# Altium PCB Nixie_Driver.PcbDoc
Units mil, origin at the board's own origin, x right, y up, seen from the top; angles counter-clockwise.
Board outline 4015.75 x 1968.5 mil, 2 copper layers (Top Layer, Bottom Layer); 62 components, 71 nets, 274 pads, 47 vias.
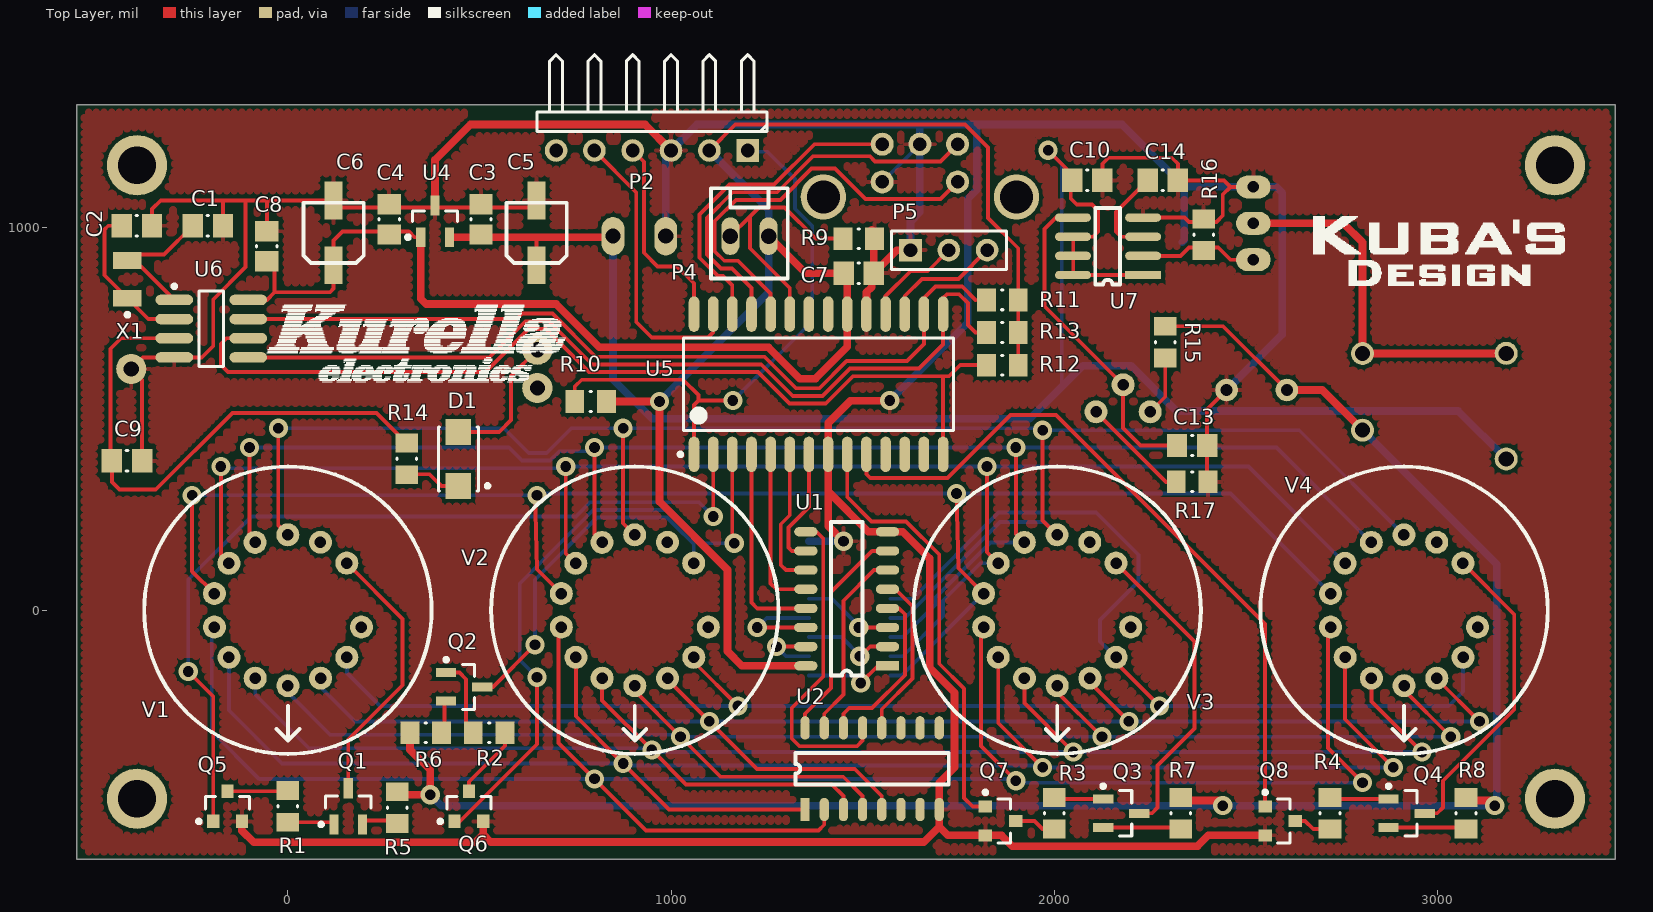
[diagram p0: Top Layer view]
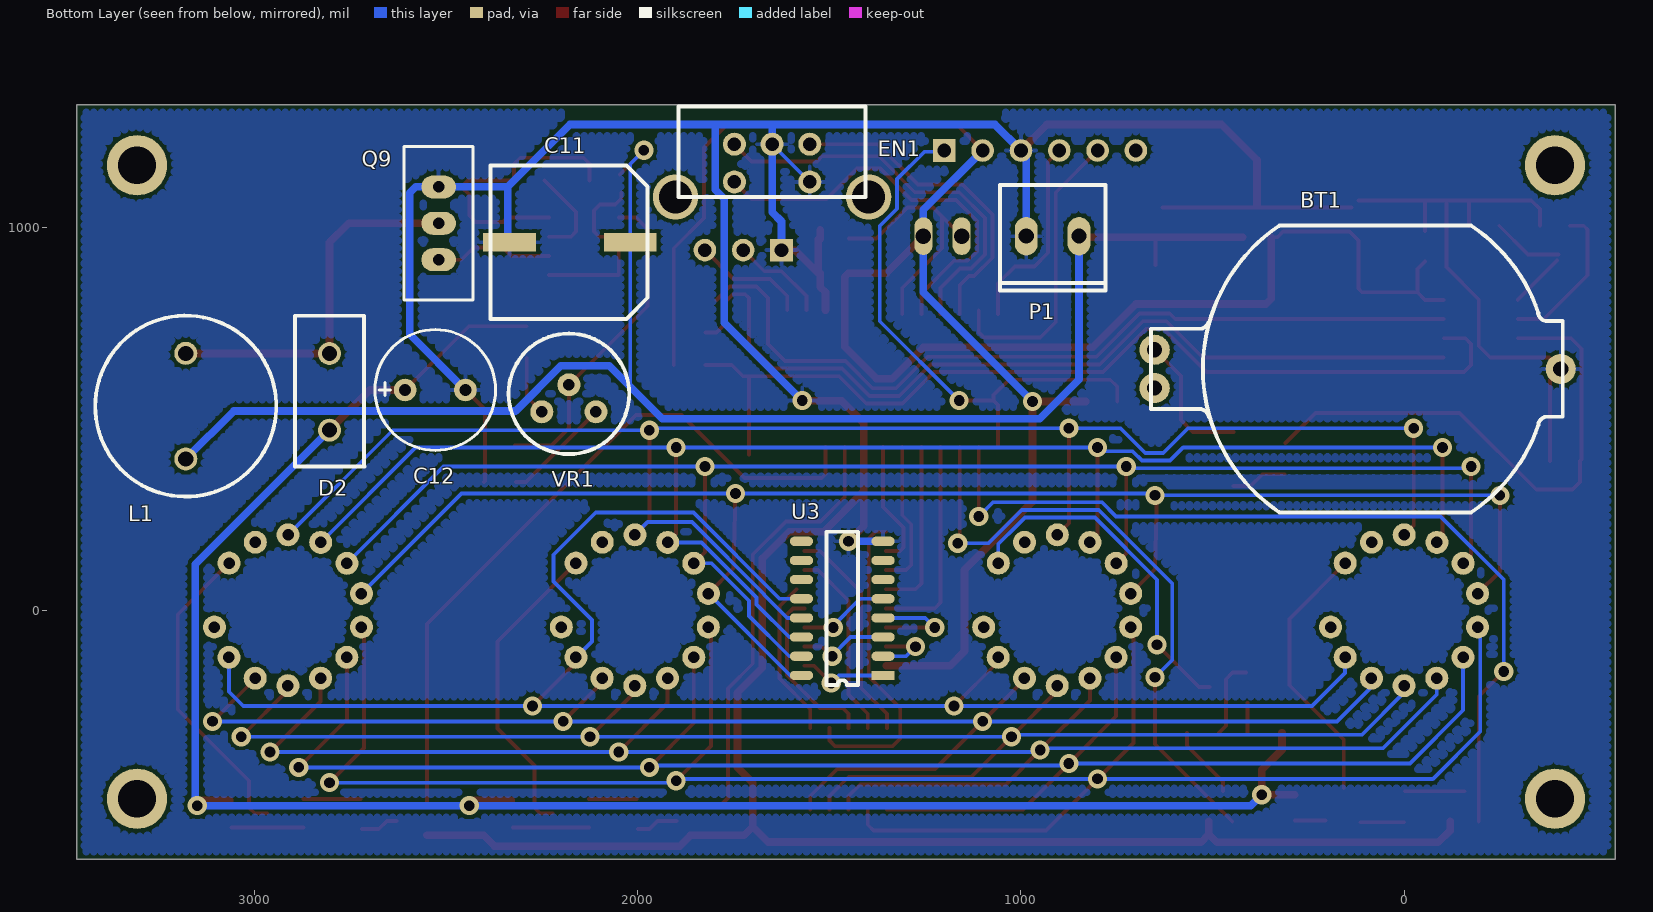
[diagram p1: Bottom Layer view, seen from below]

## Layer stack, top to bottom
Top Layer: signal copper 1.4
Dielectric: dielectric 12.6, FR-4, Dk 4.8
Bottom Layer: signal copper 1.4

## Board outline
-551.18,-649.61 -551.18,1318.9 3464.57,1318.9 3464.57,-649.61

## Design rules (kind name [scope] priority, off if disabled: settings)
Clearance [All] p1: gap=10
PolygonConnect [All] p1: connectstyle=Relief reliefconductorwidth=10 reliefentries=4 polygonreliefangle="90 Angle" airgapwidth=10
RoomDefinition Nixie_Embedded_Supply [InComponentClass('Nixie_Embedded_Supply')] p1: confinementstyle=ConfineIn formatcopy=TRUE lockcomponents=FALSE outline 1765,195 3565,195 3565,1355 1765,1355
RoomDefinition Nixie_Embedded_Controller [InComponentClass('Nixie_Embedded_Controller')] p2: confinementstyle=ConfineIn formatcopy=TRUE lockcomponents=FALSE outline -610,80 1965,80 1965,1885.83 -610,1885.83
RoomDefinition Nixie_Driver [InComponentClass('Nixie_Driver')] p3: confinementstyle=ConfineIn formatcopy=TRUE lockcomponents=FALSE outline -645,-730 3545,-730 3545,475 -645,475
RoutingVias [All] p1: holewidth=28 width=50 viastyle="Through Hole" minholewidth=28 minwidth=50 maxholewidth=28 maxwidth=50
SolderMaskExpansion [All] p1: expansion=4
Width [All] p1: maxlimit=20 minlimit=10 preferedwidth=10
28 further rules are at their usual default settings.

## Classes and differential pairs
component class Nixie_Embedded_Supply: C10 C11 C12 C13 C14 D2 L1 LED1 P6 Q9 R15 R16 R17 U7 VR1
component class Nixie_Driver: Q1 Q2 Q3 Q4 Q5 Q6 Q7 Q8 R1 R2 R3 R4 R5 R6 R7 R8 U1 U2 U3 U? V1 V2 V3 V4
component class Nixie_Embedded_Controller: BT1 C1 C2 C3 C4 C5 C6 C7 C8 C9 D1 EN1 P1 P2 P4 P5 R9 R10 R11 R12 R13 R14 U4 U5 U6 X1

## Components (designator, comment, footprint, x,y, rotation, side; value= is the part's Value field where it differs from the comment)
BT1 "TE 120591-1" TE-120591-1 75,629.92 r180 bottom locked
C1 "CAP 18pF 16V 0805(2012)" CAPC0805(2012)100_M -208.94,1003.74 r180 top
C2 "CAP 18pF 16V 0805(2012)" CAPC0805(2012)100_M -393.94,1003.74 r180 top
C3 "CAP 100nF 16V 0805(2012)" CAPC0805(2012)100_M 504.13,1020.12 r270 top
C4 "CAP 100nF 16V 0805(2012)" CAPC0805(2012)100_M 264.13,1020.12 r270 top
C5 "Polarized capacitor" "RADIAL CAP 4MM" 649.13,985.12 r270 top
C6 "Polarized capacitor" "RADIAL CAP 4MM" 119.13,985.12 r270 top
C7 "CAP 100nF 10V 0805(2012)" CAPC0805(2012)100_M 1490,880 r180 top
C8 "CAP 100nF 10V 0805(2012)" CAPC0805(2012)100_M -55,950 r270 top
C9 "CAP 100pF 10V 0805(2012)" CAPC0805(2012)100_M -420,390 r180 top
C10 "CAP 100nF 16V 0805(2012)" CAPC0805(2012)100_M 2086.61,1122.05 r180 top
C11 "CAP_rad16x10" CAPsmd_rad10 2334.65,960.63 r180 bottom
C12 "CAP_HV" CAP_HV 2450,575 r0 bottom
C13 "CAP 100nF 16V 0805(2012)" CAPC0805(2012)100_M 2360,430 r180 top
C14 "CAP 1nF 25V 0805(2012)" CAPC0805(2012)100_M 2283.46,1122.05 r180 top
D1 "SS14-E3/5AT" VISH-DO-214AC-2_V 445,395 r270 top
D2 "BYV29-400" TO-220AC 2805,670 r180 bottom
EN1 "Encoder" BOURNS_PEC12R_ENCODER 1649.61,1118.11 r0 bottom
L1 "L" Coil 3180,395 r90 bottom
P1 "12V supply" "2POS TERMINAL BLOCK 3.5MM" 1055.12,834.65 r180 bottom
P2 "ICSP header" HDR1X6H 1200,1200 r180 top
P4 "LDR" "HEADER 1X2" 1204.72,976.38 r0 top
P5 "UART" HDR1X3 1625,940 r0 top
Q1 "MMBTA92" INF-SOT23_M 157.48,-511.81 r90 top
Q2 "MMBTA92" INF-SOT23_M 460,-200 r0 top
Q3 "MMBTA92" INF-SOT23_M 2175,-530 r0 top
Q4 "MMBTA92" INF-SOT23_M 2920,-530 r0 top
Q5 "MMBTA42" ONSC-SOT-23-3-318-08_V -157.48,-511.81 r90 top
Q6 "MMBTA42" ONSC-SOT-23-3-318-08_V 472.44,-511.81 r90 top
Q7 "MMBTA42" ONSC-SOT-23-3-318-08_V 1860,-550 r0 top
Q8 "MMBTA42" ONSC-SOT-23-3-318-08_V 2590,-550 r0 top
Q9 "MCHP-MCP87090-PDFN-8" IRF840 2520,915 r0 bottom
R1 "390K 5% 0805(2012)" RESC0805(2012)_M 0,-511.81 r270 top
R2 "390K 5% 0805(2012)" RESC0805(2012)_M 525,-320 r180 top
R3 "390K 5% 0805(2012)" RESC0805(2012)_M 2000,-530 r90 top
R4 "390K 5% 0805(2012)" RESC0805(2012)_M 2720,-530 r90 top
R5 "51K 5% 0805(2012)" RESC0805(2012)_M 285,-515 r90 top
R6 "51K 5% 0805(2012)" RESC0805(2012)_M 360,-320 r180 top
R7 "51K 5% 0805(2012)" RESC0805(2012)_M 2330,-530 r90 top
R8 "51K 5% 0805(2012)" RESC0805(2012)_M 3075,-530 r90 top
R9 "10K 5% 0805(2012)" RESC0805(2012)_M 1490,970 r180 top
R10 "47K 5% 0805(2012)" RESC0805(2012)_M 790,545 r0 top
R11 "10K 5% 0805(2012)" RESC0805(2012)_M 1865,810 r0 top
R12 "2K2 5% 0805(2012)" RESC0805(2012)_M 1865,640 r0 top
R13 "2K2 5% 0805(2012)" RESC0805(2012)_M 1865,725 r0 top
R14 "1K 5% 0805(2012)" RESC0805(2012)_M 310,395 r90 top
R15 "680K 5% 0805(2012)" RESC0805(2012)_M 2290,700 r90 top
R16 "330R 5% 0805(2012)" RESC0805(2012)_M 2390,980 r270 top
R17 "3K3 1% 0805(2012)" RESC0805(2012)_M 2360,335 r180 top
U1 "CD4028B" CD4028B 1565,-145 r180 top
U2 "SN75468" SN7546X 1350,-520 r90 top
U3 "SN75468" SN7546X 1360,-170 r0 bottom
U4 "LM3480IM3-5.0" MF03A_N 384.13,1015.12 r90 top
U5 "PIC16F722A-I/SO" MCHP-SOIC-SO28_M 1385,590 r90 top
U6 "MCP7940N-I/SN" SOIC-SN8_M -200,735 r0 top
U7 "TI-MC34063AP8" SOIC8 2232.28,875 r180 top
V1 "LC-531" LC-531 0,0 r0 top locked
V2 "LC-531" LC-531 905.51,0 r0 top locked
V3 "LC-531" LC-531 2007.87,0 r0 top locked
V4 "LC-531" LC-531 2913.39,0 r0 top locked
VR1 "10k" POT7x5 2180,565 r90 bottom
X1 "32.768KHz" ABRA-ABS07-2_V -418.94,863.74 r90 top

## Footprints (in the part's own frame and the unit in brackets; to place one, negate y for a bottom-side part, rotate by r counter-clockwise, add the part's x,y. Pads: shape width x height; smd on the part's side, far side on the other; paste and mask are expansions set on the pad)
"2POS TERMINAL BLOCK 3.5MM" [mm]
  rrect100% 1.524x2.54 hole 1: 1(1.75,3.6) 2(5.25,3.6)
  silkscreen extent 0,0 7,7, body extent -0.5,0 7.5,7, height 8.84
ABRA-ABS07-2_V [mm] "Hand Drawn, 2-Leads, Body 3.2x1.5mm, Pitch 2.5mm"
  rect 1.1x1.9 smd: 1(-1.25,0) 2(1.25,0)
  silkscreen extent -2.47,-0.13 -2.23,0.12, body extent -1.6,-0.75 1.6,0.75, height 0.9
BOURNS_PEC12R_ENCODER [mm]
  round 1.524 hole 0.9: 1(-2.5,0) 2(2.5,0) 3(-2.5,-2.5) 4(2.5,-2.5) 5(0,-2.5)
  round 3 hole 2.2: 6(-6.4,1) 7(6.4,1)
  silkscreen extent -6.2,-5 6.2,1, body extent -6.25,-19 6.25,1, height 17.27
CAP_HV [mm]
  round 1.5 hole 0.8: 1(4,0) 2(0,0)
  silkscreen extent -2,-4 6,4, body extent -2,-4.06 5.97,3.92, height 12
CAPC0805(2012)100_M [mm] "Chip Capacitor, Body 2.0x1.2mm, Height 1.0mm, IPC Low Density"
  rect 1.35x1.55 smd: 1(-1,0) 2(1,0)
  silkscreen extent -0.05,-0.67 0.05,0.67, body extent -1.1,-0.72 1.1,0.72, height 1
CAPsmd_rad10 [mm]
  rect 3.5x1.2 smd: 1(8,0) 2(0,0)
  silkscreen extent -1.27,-5.08 9.14,5.08
CD4028B [mil]
  rect 61x24 smd: 1(0,0)
  oval 61x24 smd: 2(0,-50) 3(0,-100) 4(0,-150) 5(0,-200) 6(0,-250) 7(0,-300) 8(0,-350) 9(213,-350) 10(213,-300) 11(213,-250) 12(213,-200) 13(213,-150) 14(213,-100) 15(213,-50) 16(213,0)
  silkscreen extent 66,-375 148,25, body extent -16,-373 226,23, height 79
Coil [mil]
  round 60 hole 39.37: 1(0,0) 2(275.59,0)
  silkscreen extent -98,-236 374,236, body extent -99,-231 371,241, height 453
HDR1X3 [mm] "Connector; Header; 3 Position"
  rect 1.5x1.5 hole 0.9: 1(0,0)
  round 1.5 hole 0.9: 2(2.54,0) 3(5.08,0)
  silkscreen extent -1.27,-1.27 6.35,1.27
HDR1X6H [mm] "Connector; Header; 6 Position; Right Angle"
  rect 1.5x1.5 hole 0.9: 1(0,0)
  round 1.5 hole 0.9: 2(2.54,0) 3(5.08,0) 4(7.62,0) 5(10.16,0) 6(12.7,0)
  silkscreen extent -1.27,-6.35 13.97,-1.27
"HEADER 1X2" [mm]
  oval 1.2x2.5 hole 1.016: 1(-1.27,0) 2(1.27,0)
  silkscreen extent -2.54,-2.79 2.54,3.17, body extent -2.54,-2.73 2.54,3.11, height 10.03
INF-SOT23_M [mm] "SOT23, 3-Leads, Body 2.9x1.3 mm, Pitch 0.95 mm, IPC Low Density"
  rect 1.35x0.6 smd: 1(-1.2,0.95) 2(-1.2,-0.95) 3(1.2,0)
  silkscreen extent -1.32,-1.5 0.7,1.92, body extent -0.7,-1.5 0.7,1.5, height 1.1
IRF840 [mil]
  rrect100% 90x60 hole 30: 1(0,0)
  oval 90x60 hole 30: 2(0,-95) 3(0,-190)
  silkscreen extent -90,-295 90,105
LC-531 [mil] "Nixie tube"
  round 60 hole 30: 1(153.62,123.08) 2(85.04,177.53) 3(-0.35,196.85) 4(-85.67,177.23) 5(-154.06,122.54) 6(-191.97,43.61) 7(-191.88,-43.95) 8(-153.84,-122.81) 9(-85.37,-177.38) 10(0,-196.85) 11(85.37,-177.38) 12(153.84,-122.81) 13(191.88,-43.95)
  silkscreen extent -375,-375 375,375, body extent -371,-368 374,378, height 433
MCHP-SOIC-SO28_M [mm] "SOIC, 28-Leads, Body 17.9x7.5mm, Pitch 1.27mm, IPC Low Density"
  oval 2.35x0.7 smd: 1(-4.65,8.255) 2(-4.65,6.985) 3(-4.65,5.715) 4(-4.65,4.445) 5(-4.65,3.175) 6(-4.65,1.905) 7(-4.65,0.635) 8(-4.65,-0.635) 9(-4.65,-1.905) 10(-4.65,-3.175) 11(-4.65,-4.445) 12(-4.65,-5.715) 13(-4.65,-6.985) 14(-4.65,-8.255) 15(4.65,-8.255) 16(4.65,-6.985) 17(4.65,-5.715) 18(4.65,-4.445) 19(4.65,-3.175) 20(4.65,-1.905) 21(4.65,-0.635) 22(4.65,0.635) 23(4.65,1.905) 24(4.65,3.175) 25(4.65,4.445) 26(4.65,5.715) 27(4.65,6.985) 28(4.65,8.255)
  silkscreen extent -4.77,-8.95 3.08,9.28, body extent -3.75,-8.95 3.75,8.95, height 2.65
MF03A_N [mm] "SOT23, 3-Leads, Body 2.9x1.3mm, Pitch 0.95mm, Lead Span 2.4mm, IPC Medium Density"
  rect 1.3x0.6 smd: 1(-1.05,0.95) 2(-1.05,-0.95) 3(1.05,0)
  silkscreen extent -1.17,-1.5 0.7,1.92, body extent -0.7,-1.52 0.7,1.52, height 1.12
ONSC-SOT-23-3-318-08_V [mm] "SOT23, 3-Leads, Body 2.92x1.3mm, Pitch 0.95mm"
  rect 0.9x0.8 smd: 1(-1,0.95) 2(-1,-0.95) 3(1,0)
  silkscreen extent -1.12,-1.46 0.65,2.02, body extent -0.65,-1.46 0.65,1.46, height 1.11
POT7x5 [mil]
  round 60 hole 30: 1(-47.09,70.71) 2(23.62,0) 3(-47.09,-70.71)
  silkscreen extent -157,-157 157,157, body extent -137,-138 138,138, height 236
"RADIAL CAP 4MM" [mm]
  rect 2.5x1.2 smd: 1(2.15,0) 2(-2.15,0)
  silkscreen extent -2,-2 2,2, body extent -2,-2 2,2, height 5.8
RESC0805(2012)_M [mm] "Chip Resistor, Body 2.0x1.3mm, IPC Low Density"
  rect 1.25x1.5 smd: 1(-1.05,0) 2(1.05,0)
  silkscreen extent -0.05,-0.65 0.05,0.65, body extent -1.1,-0.67 1.1,0.67, height 0.7
SN7546X [mil]
  rect 61x24 smd: 1(0,0)
  oval 61x24 smd: 2(0,-50) 3(0,-100) 4(0,-150) 5(0,-200) 6(0,-250) 7(0,-300) 8(0,-350) 9(213,-350) 10(213,-300) 11(213,-250) 12(213,-200) 13(213,-150) 14(213,-100) 15(213,-50) 16(213,0)
  silkscreen extent 66,-375 148,25, body extent -16,-373 226,23, height 79
SOIC8 [mil]
  rect 94x22 smd: 1(0,0)
  oval 94x22 smd: 2(0,-50) 3(0,-100) 4(0,-150) 5(183,-150) 6(183,-100) 7(183,-50) 8(183,0)
  silkscreen extent 60,-175 125,25, body extent -31,-173 211,23, height 79
SOIC-SN8_M [mm] "SOIC, 8-Leads, Body 4.9x3.9mm, Pitch 1.27mm, IPC Low Density"
  oval 2.5x0.7 smd: 1(-2.45,1.905) 2(-2.45,0.635) 3(-2.45,-0.635) 4(-2.45,-1.905) 5(2.45,-1.905) 6(2.45,-0.635) 7(2.45,0.635) 8(2.45,1.905)
  silkscreen extent -2.57,-2.5 0.8,2.93, body extent -2,-2.5 2,2.5, height 1.75
TE-120591-1 [mm]
  round 2 hole 1: 1(-14.63,1.27) 2(-14.63,-1.27) 3(12.29,0)
  silkscreen extent -14.88,-9.52 12.42,9.52
TO-220AC [mil]
  round 60 hole 39.37: 1(0,0) 2(0,-200)
  silkscreen extent -90,-295 91,99
VISH-DO-214AC-2_V [mm] "SMA, 2-Leads, Body 4.245x2.665mm, Height 2.29mm"
  rect 1.7x1.68 smd: 1(-1.79,0) 2(1.79,0)
  silkscreen extent -2.12,-1.33 2.12,2.06, body extent -2.57,-1.33 2.57,1.33, height 2.29

## Part data
BT1: library part TECO-120591-1-2
C1 C2: library part CMP-1036-01121-1, "CAP 18pF 16V ±5% 0805 (2012 Metric) Thickness 1mm SMD"
C3 C4: library part CMP-1036-04405-1, "CAP 100nF 16V ±20% 0805 (2012 Metric) Thickness 1mm SMD"
C5 C6: library part "Cap radial smd 4x5.4"
C7 C8: library part CMP-1036-04393-1, "CAP 100nF 10V ±5% 0805 (2012 Metric) Thickness 1mm SMD"
C9: library part CMP-1036-01930-1, "CAP 100pF 10V ±2% 0805 (2012 Metric) Thickness 1mm SMD"
C10 C13: library part CMP-1036-04400-1, "CAP 100nF 16V ±5% 0805 (2012 Metric) Thickness 1mm SMD"
C14: library part CMP-1036-02963-1, "CAP 1nF 25V ±1% 0805 (2012 Metric) Thickness 1mm SMD"
D1: library part CMP-0549-00004-1, "Schottky Barrier Rectifier, 40 V Maximum DC Blocking Voltage, -65 to 125 degC, 2-Pin SMA Case, RoHS"
P1: library part "2pos terminal block 3.5mm", "TE 1776275-2"
P2: library part "Header 6H", "Header, 6-Pin, Right Angle"
P4: library part "Header 1x2", "TE 640456-2"
P5: library part "Header 3", "Header, 3-Pin"
Q1 Q2 Q3 Q4: library part CMP-1197-00010-1, "PNP Silicon High-Voltage Transistor, 300 V VCEO, 500 mA IC, SOT23, Reel, Green"
Q5 Q6 Q7 Q8: library part CMP-1048-00662-1, "High Voltage Transistor, NPN Silicon, 3-Pin SOT-23, Pb-Free, Tape and Reel"
R1 R2 R3 R4: library part CMP-1013-00136-1, "390K 0.125W 5% 0805 (2012 Metric)  SMD"
R5 R6 R7 R8: library part CMP-1013-00115-1, "51K 0.125W 5% 0805 (2012 Metric)  SMD"
R9 R11: library part CMP-1013-00098-1, "10K 0.125W 5% 0805 (2012 Metric)  SMD"
R10: library part CMP-1013-00114-1, "47K 0.125W 5% 0805 (2012 Metric)  SMD"
R12 R13: library part CMP-1013-00082-1, "2K2 0.125W 5% 0805 (2012 Metric)  SMD"
R14: library part CMP-1013-00074-1, "1K 0.125W 5% 0805 (2012 Metric)  SMD"
R15: library part CMP-1013-00142-1, "680K 0.125W 5% 0805 (2012 Metric)  SMD"
R16: library part CMP-1013-00062-1, "330R 0.125W 5% 0805 (2012 Metric)  SMD"
R17: library part CMP-1013-00567-1, "3K3 0.125W 1% 0805 (2012 Metric)  SMD"
U1: "BCD-to-decimal driver"
U2 U3: library part SN7546x, "Darlington Transistor Array"
U4: library part CMP-0062-02200-1, "100 mA, Quasi Low-Dropout Linear Voltage Regulator, 3-pin SOT-23, Pb-Free"
U5: library part CMP-0115-02602-1, "Flash Microcontroller with nanoWatt XLP Technology, 20 MHz, 24 I/O, -40 to 85 degC, 28-pin SOIC (SO28), Tube"
U6: library part CMP-0186-00196-1, "Low-Cost I2C Real-Time Clock/Calendar with SRAM and Battery Switchover, 8-Pin SOIC, Industrial Temperature"
V1 V2 V3 V4: library part LC531, "Nixie tube"
VR1: library part RESPOT_ST-V01, "Potentiometer"
X1: library part CMP-0447-00001-1, "Crystal, 32.768 kHz, 12.5 pF, -40 to 85 degC, SMD Low Profile 3.2 x 1.5 x 0.9 mm, Tape and Reel"

## Free pads (board coordinates)
  round 157.48 hole 98.43: 1(-393.7,-492.13) 2(-393.7,1161.42) 3(3307.09,1161.42) 4(3307.09,-492.13)

## Via types
v1: diameter 50, hole 28, Top Layer to Bottom Layer, 47 vias

## Nets (pads, with @x,y where several pads share a name; then routed paths per layer and width w, separated by ;. In a path a pad name is that pad's centre, name@x,y a point inside that pad or via, vN(x,y) a via of type N, cw(c..) or ccw(c..) an arc to the next point about the centre after c; other vN are vias at no path point)
ANODE1: Q5.1 U5.2 | length 2309
  Top Layer w10: v1(-260,-160) -194.88,-225.12 Q5.1 ; v1(1110,245) U5.2@1110,426.85
  Bottom Layer w10: v1(-260,-160) -260,80.24 -95.24,245 751.72,245 788.57,281.85 1073.15,281.85 v1(1110,245)
ANODE2: Q6.1 U5.3 | length 1652.7
  Top Layer w10: Q6.1@448.38,-551.18 650,-349.56 v1(650,-175) ; U5.3@1160,426.85 1160,180 v1(1165,175)
  Bottom Layer w10: v1(650,-175) 605,-130 605,70 796.85,261.85 998.15,261.85 1017.47,242.53 ; 1017.47,242.53 1085,175 v1(1165,175)
ANODE3: Q7.1 U5.9 | length 1160.9
  Top Layer w10: U5.9@1460,426.85 U5.9 1460,295.36 1523.36,232 1613.36,232 1700,145.36 1700,-139.64 1765,-204.64 1765,-490 1787.6,-512.6 Q7.1
ANODE4: Q8.1 U5.10 | length 1887.9
  Top Layer w10: U5.10@1510,426.85 U5.10 1510,355 1520,345 1721.25,345 1886.25,510 2005,510 2550.63,-35.63 Q8.1
DIGIT1: U1.10 U5.7 | length 334.5
  Top Layer w10: U1.10 1315,155 1306.5,163.5 1306.5,216.18 1360,269.68 U5.7@1360,426.85
DIGIT2: U1.13 U5.4 | length 555.1
  Top Layer w10: U5.4@1210,426.85 1210,20 1225,5 U1.13
DIGIT3: U1.12 U5.5 | length 455.1
  Top Layer w10: U5.5@1260,426.85 1260,70 1275,55 U1.12
DIGIT4: U1.11 U5.6 | length 389.2
  Top Layer w10: U5.6@1310,426.85 1310,247.97 1286.5,224.47 1286.5,118.5 1300,105 U1.11
GND: BT1.3 C1.1 C2.1 C3.1 C4.1 C5.2 C6.2 C7.1 C8.1 C9.1 C10.1 C11.2 C12.2 C13.1 C14.1 EN1.1 EN1.5 P1.1 P2.3 P5.1 Q5.2 Q6.2 Q7.2 Q8.2 Q9.3 R9.1 R16.1 R17.1 U1.8 U2.8 U3.8 U4.3 U5.8 U5.19 U6.4 U7.4 | length 12655.9
  Top Layer w10: BT1.3 -378.78,660 U6.4 -225,660 -195,690 -195,811.54 -111.02,895.51 -111.02,1068.98 ; C9.1 -380.63,601.69 ; C2.1 -354.57,1047.01 -331.81,1069.76 C6.2 ; C1.1 -169.57,1065.55 ; C8.1 -55,1069.65 ; C6.2@137.28,1051.61 C5.2@630.98,1051.61 ; C10.1 2125.98,1165.35 2141.73,1181.1 2307.09,1181.1 2322.83,1165.35 C14.1 2442.95,1122.05 2460,1105 ; U7.4 2340,1025 2351.54,1013.46 2423.46,1013.46 2440,1030 2440,1085 2460,1105 ; R17.1 2399.37,336.97 C13.1 2399.37,524.37 C12.2 ; Q9.3 2460,1105
  Top Layer w20: Q5.2 -120.08,-574.92 -89.37,-605.63 489.37,-605.63 509.84,-585.16 ; U4.3 384.13,1175.47 476.38,1267.72 932.28,1267.72 P2.3 ; Q6.2 509.84,-585.16 ; v1(1450,180) 1410,220 1410,310 ; U5.19@1510,783.15 1510,830 1523.46,843.46 C7.1@1523.46,880 ; R9.1@1523.46,968.03 R9.1@1523.46,993.46 ; R9.1@1529.37,968.03 C7.1 1589.37,940 P5.1 ; v1(1570.87,547.24) 1468.5,547.24 1410,488.74 U5.8 1410,310 ; Q8.2 2402.6,-587.4 2374.06,-615.94 1890.94,-615.94 1862.4,-587.4 Q7.2 1722.4,-587.4 1700,-565 ; 509.84,-585.16 529.68,-605 1660,-605 1700,-565 ; 1410,310 1515,205 U1.8 1605,205 1675,135 1675,-150 1740,-215 1740,-410 1700,-450 U2.8 1700,-565
  Bottom Layer w10: EN1.1 EN1.5
  Bottom Layer w20: P1.1 986.22,1186.22 P2.3 1067.72,1267.72 1649.61,1267.72 ; U3.8 v1(1450,180) ; v1(1570.87,547.24) 1774.53,750.91 1774.53,1073.9 1798.03,1097.4 1798.03,1266.54 ; P5.1 1625,1014.76 1649.61,1039.37 EN1.5 1649.61,1267.72 ; C11.2 2340,965.98 2340,1105 ; C12.2 2595,720 2595,1090 2580,1105 Q9.3 2340,1105 ; 1649.61,1267.72 2177.28,1267.72 2340,1105
HT: C12.1 D2.2 R5.2 R6.2 R7.2 R8.2 R15.2 | length 5021
  Top Layer w10: R15.2 2441.14,741.34 C12.1
  Top Layer w20: R5.2@285,-481.54 v1(371.54,-481.54) 371.54,-416.54 318.66,-363.66 R6.2 ; R7.2@2330,-496.54 2426.54,-496.54 v1(2440,-510) ; C12.1 2700,575 D2.2 ; R8.2@3065,-496.54 3136.54,-496.54 v1(3150,-510)
  Bottom Layer w20: v1(371.54,-481.54) 400,-510 v1(2440,-510) v1(3150,-510) 3155.27,-504.73 3155.27,119.73 D2.2
NetBT1_1: BT1.1 D1.1 | length 362.1
  Top Layer w10: D1.1 551.46,465.47 582.68,496.69 582.68,611.61 BT1.1
NetC1_2: C1.2 U6.1 X1.2 | length 331.5
  Top Layer w10: X1.2@-403.15,928.74 -323.31,928.74 C1.2 ; X1.2@-399.41,912.95 U6.1
NetC2_2: C2.2 U6.2 X1.1 | length 398.9
  Top Layer w10: C2.2 -468.94,1003.74 -478.94,993.74 -478.94,874.53 X1.1 -364.41,760 U6.2
NetC9_2: C9.2 R14.2 U6.3 | length 1420.7
  Top Layer w10: U6.3 -435.67,710 -463.23,682.44 -463.23,393.86 C9.2 -459.37,334.37 -440,315 -345,315 -145,515 231.34,515 R14.2
NetC13_2: C13.2 U7.5 VR1.2 | length 851.3
  Top Layer w10: U7.5@2050,1025 2005,1025 1975,995 1975,793.62 VR1.2 2180,475.49 2225.49,430 C13.2
NetC14_2: C14.2 U7.3 | length 244.4
  Top Layer w10: U7.3 2174.61,975 2161.42,988.19 2161.42,1039.37 C14.2
NetD1_2: D1.2 R14.1 | length 146.3
  Top Layer w10: R14.1@311.34,355 370,355 400.47,324.53 D1.2
NetD2_1: D2.1 L1.2 Q9.2 | length 970.1
  Top Layer w20: Q9.2 2755,1010 2805,960 D2.1 L1.2@3179.41,670
NetEN1_1: EN1.2 U5.24 | length 1066.4
  Top Layer w10: U5.24 1260,826.61 1174.45,912.17 1138.73,912.17 1114.17,936.72 1114.17,1016.04 1169.32,1071.18 1285.35,1071.18 1366.96,1152.8 1428.31,1152.8 1508,1073.11 1703.03,1073.11 EN1.2
NetEN1_3: EN1.4 U5.25 | length 1060.5
  Top Layer w10: U5.25 1210,840.89 1158.73,892.17 1130.44,892.17 1094.17,928.43 1094.17,1024.32 1161.03,1091.18 1277.06,1091.18 1370.92,1185.04 1519.04,1185.04 1532.54,1171.54 1703.03,1171.54 EN1.4
NetEN1_4: EN1.3 U5.26 | length 856.2
  Top Layer w10: U5.26 1160,847.87 1135.71,872.17 1122.16,872.17 1074.17,920.15 1074.17,1032.61 1152.75,1111.18 1268.78,1111.18 1374.14,1216.54 EN1.3
NetP2_4: P2.4 U5.28 | length 523.2
  Top Layer w10: P2.4 929.13,1170.87 929.13,933.07 964.57,897.64 1015.75,897.64 1060,853.39 U5.28
NetP2_5: P2.5 U5.27 | length 774.2
  Top Layer w10: P2.5 909.13,1090.87 909.13,752.28 949.61,711.81 1096.81,711.81 1110,725 U5.27 U5.27@1110,783.15
NetP4_1: P4.1 R9.2 U5.23 | length 656.2
  Top Layer w10: P4.1 1205.91,1027.56 ; U5.23 1310,840.89 1205.91,944.99 1205.91,1027.56 ; R9.2 1377.68,970 1296.5,1051.18 1229.53,1051.18 1205.91,1027.56
NetP5_2: P5.2 U5.18 | length 251.6
  Top Layer w10: U5.18@1560,783.15 1560,820 1625,885 1670,885 P5.2
NetP5_3: P5.3 U5.17 | length 301.6
  Top Layer w10: U5.17@1610,783.15 1610,820 1655,865 1750,865 P5.3
NetQ1_1: Q1.1 R1.2 | length 114.2
  Top Layer w10: R1.2 Q1.1@114.17,-553.15
NetQ1_2: Q1.2 R5.1 | length 79.5
  Top Layer w10: Q1.2@205.47,-548.46 R5.1@285,-548.46
NetQ1_3: Q1.3 V1.1 | length 706.7
  Top Layer w10: V1.1 299.21,-22.51 299.21,-195.79 157.48,-337.52 Q1.3
NetQ2_1: Q2.1 R2.2 | length 207.2
  Top Layer w10: Q2.1 447.6,-162.6 465,-180 465,-301.34 R2.2
NetQ2_2: Q2.2 R6.1 | length 78.3
  Top Layer w10: R6.1@408.46,-320 Q2.2@408.46,-241.69
NetQ2_3: Q2.3 V2.1 | length 912.5
  Top Layer w10: Q2.3 535,-200 v1(645,-90)
  Bottom Layer w10: v1(645,-90) 645,79.73 807.12,241.85 989.87,241.85 1009.19,222.53 1059.13,172.58 V2.1
NetQ3_1: Q3.1 R3.2 | length 123.8
  Top Layer w10: R3.2@2003.94,-492.6 Q3.1
NetQ3_2: Q3.2 R7.1 | length 198.3
  Top Layer w10: Q3.2 R7.1@2326.06,-567.4
NetQ3_3: Q3.3 V3.1 | length 816.6
  Top Layer w10: V3.1 2366.14,-81.57 2366.14,-308.86 2270,-405 2270,-515 2255,-530 Q3.3
NetQ4_1: Q4.1 R4.2 | length 148.8
  Top Layer w10: R4.2@2723.94,-492.6 Q4.1
NetQ4_2: Q4.2 R8.1 | length 188.3
  Top Layer w10: Q4.2 R8.1@3061.06,-567.4
NetQ4_3: Q4.3 V4.1 | length 824.4
  Top Layer w10: Q4.3 3000,-530 3015,-515 3015,-445 3200.79,-259.21 3200.79,-10.7 V4.1
NetQ5_3: Q5.3 R1.1 | length 155.5
  Top Layer w10: Q5.3 R1.1@-1.97,-472.44
NetQ6_3: Q6.3 R2.1 | length 191.3
  Top Layer w10: Q6.3 472.44,-447.56 566.34,-353.66 R2.1
NetQ7_3: Q7.3 R3.1 | length 109.5
  Top Layer w10: Q7.3 1948.43,-550 1969.76,-571.34 R3.1
NetQ8_3: Q8.3 R4.1 | length 99.5
  Top Layer w10: Q8.3 2655,-550 2676.34,-571.34 R4.1
NetQ9_1: Q9.1 R16.2 U7.2 | length 309.7
  Top Layer w10: U7.2 2330,925 2351.54,946.54 2390,946.54 2428.46,946.54 2460,915 Q9.1
NetR15_1: R15.1 VR1.1 | length 157
  Top Layer w10: VR1.1 2290,557.2 R15.1
NetR17_2: R17.2 VR1.3 | length 285.1
  Top Layer w10: VR1.3 2292.2,335 R17.2
NetU1_1: U1.1 U3.1 | length 241.9
  Top Layer w10: v1@1500,-190 v1(1495,-190) 1540,-145 U1.1
  Bottom Layer w10: U3.1 1475,-170 v1(1495,-190) v1@1500,-190
NetU1_2: U1.2 U3.3 | length 241.1
  Top Layer w10: v1(1492.5,-120) 1495,-120 1520,-95 U1.2
  Bottom Layer w10: U3.3 1445,-70 1495,-120 v1(1492.5,-120)
NetU1_3: U1.3 U3.5 | length 246.1
  Top Layer w10: v1(1490,-45) U1.3
  Bottom Layer w10: U3.5 1420,30 1495,-45 v1(1490,-45)
NetU1_4: U1.4 U2.14 | length 450
  Top Layer w10: U2.14 1450,-270 1465,-255 1525,-255 1610.5,-169.5 1610.5,-10.5 1595,5 U1.4
NetU1_5: U1.5 U2.12 | length 413.8
  Top Layer w10: U2.12 1550,-258.28 1630.5,-177.78 1630.5,10.5 U1.5@1586,55
NetU1_6: U1.6 U2.15 | length 500.8
  Top Layer w10: U2.15 1400,-270 1450,-220 1450,25 1530,105 U1.6
NetU1_7: U1.7 U2.16 | length 574.5
  Top Layer w10: U2.16 1350,-270 1417.5,-202.5 1417.5,47.5 1525,155 U1.7
NetU1_9: U1.9 U2.13 | length 841.9
  Top Layer w10: U1.9 1380,205 1397.5,187.5 1397.5,-172.5 1315,-255 1315,-335 1335,-355 1485,-355 1500,-340 U2.13
NetU1_14: U1.14 U3.4 | length 272.4
  Top Layer w10: v1(1225,-45) U1.14
  Bottom Layer w10: v1(1225,-45) 1250,-20 U3.4
NetU1_15: U1.15 U3.2 | length 172.4
  Top Layer w10: v1(1275,-95) U1.15
  Bottom Layer w10: v1(1275,-95) 1300,-120 U3.2
NetU2_1: U2.1 V1.8 V2.8 V3.8 V4.8 | length 4766.2
  Top Layer w10: V2.8 751.67,-276.67 v1(875,-400) 995,-520 U2.1 ; V3.8 1854.03,-294.03 v1(1970,-410) ; V4.8 2759.54,-284.54 v1(2885,-410)
  Bottom Layer w10: V1.8 -153.84,-261.16 -15,-400 v1(875,-400) 880,-405 1965,-405 v1(1970,-410) v1(2885,-410)
NetU2_2: U2.2 V1.7 V2.7 V3.7 V4.7 | length 5342.4
  Top Layer w10: V2.7 706.67,-50.91 706.67,-346.67 v1(800,-440) 935,-575 1385,-575 1400,-560 U2.2 ; V3.7@1809.03,-50.91 1809.03,-354.03 v1(1900,-445) ; V4.7@2714.54,-50.91 2714.54,-359.54 v1(2805,-450)
  Bottom Layer w10: V1.7 -198.84,-50.91 -198.84,-316.16 -75,-440 v1(800,-440) 1895,-440 v1(1900,-445) 1905,-450 v1(2805,-450)
NetU2_3: U2.3 V1.9 V2.9 V3.9 V4.9 | length 4468.7
  Top Layer w10: V2.9 820.15,-235.15 v1(950,-365) 1039.5,-454.5 1419.5,-454.5 1450,-485 U2.3 ; V3.9 1922.51,-242.51 v1(2050,-370) ; V4.9 2828.02,-238.02 v1(2960,-370)
  Bottom Layer w10: V1.9 -85.37,-219.63 55,-360 945,-360 v1(950,-365) 955,-370 v1(2050,-370) v1(2960,-370)
NetU2_4: U2.4 V1.10 V2.10 V3.10 V4.10 | length 4181.6
  Top Layer w10: V2.10@905.51,-210.51 v1(1025,-330) 1129.5,-434.5 1449.5,-434.5 1500,-485 U2.4 ; V3.10@2007.87,-212.87 v1(2125,-330) ; V4.10@2913.39,-208.39 v1(3035,-330)
  Bottom Layer w10: V1.10 0,-215 110,-325 1020,-325 v1(1025,-330) v1(2125,-330) v1(3035,-330)
NetU2_5: U2.5 V1.11 V2.11 V3.11 V4.11 | length 4109.6
  Top Layer w10: V2.11 990.88,-180.88 v1(1100,-290) 1224.5,-414.5 1479.5,-414.5 1550,-485 U2.5 ; V3.11@2093.24,-188.24 v1(2195,-290) ; V4.11@2998.75,-178.75 v1(3110,-290)
  Bottom Layer w10: V1.11 85.37,-200.37 175,-290 v1(1100,-290) v1(2195,-290) v1(3110,-290)
NetU3_12: U3.12 V1.12 V2.12 V3.12 V4.12 | length 4543.1
  Top Layer w10: V2.12 1059.35,-134.35 v1(1175,-250) ; V3.12@2161.72,-136.72 v1(2275,-250)
  Bottom Layer w10: V1.12 153.84,-163.84 240,-250 v1(1175,-250) v1(2275,-250) 3030,-250 3067.23,-212.77 V4.12 ; U3.12 1630,30 1855,255 2110,255 2220,145 2220,75 2120,-25 2120,-81.09 V3.12
NetU3_13: U3.13 V1.3 V2.3 V3.3 V4.3 | length 4529.9
  Top Layer w10: v1(-25,475) -25,221.5 V1.3 ; v1(875,475) 875,227.01 V2.3 ; v1(1970,470) 1970,234.37 V3.3
  Bottom Layer w10: v1(-25,475) 564.09,475 628.46,410.63 675.78,410.63 740.15,475 v1(875,475) 1970,475 v1(1970,470) 2639.88,470 V4.3 ; U3.13 1610,-20 1670,40 1670,41.57 1858.43,230 1974.37,230 V3.3
NetU3_14: U3.14 V1.4 V2.4 V3.4 V4.4 | length 4228.3
  Top Layer w10: v1(-100,425) -100,191.56 V1.4 ; V2.4@800,197.07 v1(800,425) ; 1900,199.43 v1(1900,425)
  Bottom Layer w10: v1(-100,425) 576.61,425 610.98,390.63 684.06,390.63 708.43,415 790,415 v1(800,425) v1(1900,425) 2579.94,425 V4.4 ; U3.14 1605,-70 1690,15 1690,33.28 1833.94,177.23 V3.4
NetU3_15: U3.15 V1.5 V2.5 V3.5 V4.5 | length 4230
  Top Layer w10: v1(-175,375) -175,143.49 V1.5 ; v1(725,375) 725,149 V2.5 ; v1(1825,375) 1825,151.36 V3.5
  Bottom Layer w10: v1(-175,375) -170.63,370.63 v1@720.63,370.63 ; v1(725,375) v1(1825,375) 2506.87,375 V4.5 ; U3.15 1605,-120 1710,-15 1710,25 1807.54,122.54 V3.5
NetU3_16: U3.16 V1.6 V2.6 V3.6 V4.6 | length 4280.1
  Top Layer w10: v1(-250,300) -250,101.65 V1.6 ; v1(650,300) 645,305 650,107.16 V2.6 ; v1(1745,305) 1750,109.52 V3.6
  Bottom Layer w10: v1(-250,300) v1(650,300) ; v1@645,305 v1(1745,305) 2460.03,305 V4.6 ; U3.16 1602.29,-170 V3.6
RESET: P2.1 R10.1 U5.1 | length 1452.2
  Top Layer w10: R10.1 748.66,583.66 766.81,601.81 1031.5,601.81 1071.81,561.5 1071.81,547.24 ; U5.1@1060,426.85 1060,535.43 1071.81,547.24 ; v1(1161.42,547.24) 1071.81,547.24
  Bottom Layer w10: v1(1161.42,547.24) 1368.62,754.45 1368.62,1003.03 1323.58,1048.07 1323.58,1125.24 1251.97,1196.85 1203.15,1196.85 P2.1
RTC_MFP: R11.1 U5.16 U6.7 | length 2179.8
  Top Layer w10: U6.7 597.37,760 611.66,774.29 690.28,774.29 802.76,661.81 1243.86,661.81 1326.06,579.61 1387.26,579.61 1458.44,650.79 1615.79,650.79 1660,695 1660,815 1690,845 1760,845 1795,810
SCL: R12.1 U5.14 U6.6 | length 2510.2
  Top Layer w10: U6.6 -160,710 -175,695 -175,640 -156.81,621.81 515.75,621.81 628.23,734.29 673.51,734.29 785.99,621.81 1227.29,621.81 1309.49,539.61 1403.83,539.61 1475.01,610.79 1725.79,610.79 1755,640 R12.1 ; U5.14 1710,609.45
SDA: R13.1 U5.15 U6.5 | length 2302.8
  Top Layer w10: U6.5 525.65,660 619.94,754.29 681.79,754.29 794.27,641.81 1235.57,641.81 1317.78,559.61 1395.55,559.61 1466.73,630.79 1647.5,630.79 1710,693.28 1710,815 1720,825 1751.72,825 1775,801.72 1775,745 1795,725 R13.1
VCC: C4.2 C6.1 C7.2 C8.2 P2.2 P4.2 R10.2 R11.2 R12.2 R13.2 U1.16 U4.1 U5.20 U6.8 | length 5822.1
  Top Layer w10: U6.8 -55,810 -35,830 ; C8.2 -35,890.63 -35,830 ; U4.1 330.47,973.78 315.63,988.62 142.64,988.62 119.13,965.12 C6.1 119.13,839.61 109.53,830 -35,830 ; P2.2 1167.72,1267.72 1767.72,1267.72 1827.52,1207.91 1827.52,1023.7 1906.34,944.88 R11.2 R13.2 R12.2
  Top Layer w20: U4.1 346.73,813.27 360.71,799.29 700.71,799.29 813.19,686.81 1254.21,686.81 1336.42,604.61 1376.91,604.61 1460,687.7 U5.20 1460,870.63 C7.2 1351.1,880 P4.2 ; R10.2 v1(970,545) 970,282.92 1147.39,105.53 1147.39,-107.39 1185,-145 U1.16
  Bottom Layer w20: v1(970,545) 1254.72,829.72 P4.2 1254.72,1045.28 P2.2
VIN: C3.2 C5.1 C10.2 C11.1 L1.1 P1.2 U4.2 U7.1 U7.6 U7.7 U7.8 | length 4630.2
  Top Layer w10: C5.1 649.13,973.31 ; v1(1984.25,1200.79) C10.2@2047.24,1137.8 ; 2043.31,1090.55 2043.31,1074.8 2059.06,1059.06 2098.43,1059.06 2114.17,1043.31 2114.17,988.19 2100.98,975 U7.6@2050,975 ; U7.6 U7.6@2050,975 ; U7.1 2050,875 U7.6@2050,975
  Top Layer w20: U4.2 P1.2@845.83,973.78
  Bottom Layer w10: v1(1984.25,1200.79) 2020,1165.04 2020,585
  Bottom Layer w20: P1.2 848.43,602.94 951.36,500 1936.36,500 2074.98,638.62 2200.71,638.62 2319.33,520 3055,520 L1.1
pads on no net: BT1.2 EN1.6 EN1.7 P2.6 U2.6 U2.7 U2.9 U2.10 U2.11 U3.6 U3.7 U3.9 U3.10 U3.11 U5.11 U5.12 U5.13 U5.21 U5.22 V1.2 V1.13 V2.2 V2.13 V3.2 V3.13 V4.2 V4.13

## Polygon pours and split planes (outlines as drawn)
GND on Top Layer "Top Layer-No Net" (hatched 90Degree grid 20 track 20, pour order 6): -531.5,-629.92 -531.5,1299.21 3444.88,1299.21 3444.88,-629.92
GND on Bottom Layer "Top Layer-No Net" (hatched 90Degree grid 20 track 20, pour order 8): -531.5,-629.92 -531.5,1299.21 3444.88,1299.21 3444.88,-629.92

## Silkscreen, mask and mechanical layers (free items; w line width, h text height)
Top Overlay:
  drawing of 1172 lines, arcs and shapes, not listed